# Altium PCB KC_BaseBoard4CompareTest-V0.3.PcbDoc
Units mil, origin at the board's own origin, x right, y up, seen from the top; angles counter-clockwise.
Board outline 7200 x 4200 mil, 2 copper layers (Top Layer, Bottom Layer); 26 components, 14 nets, 62 pads, 5 vias.
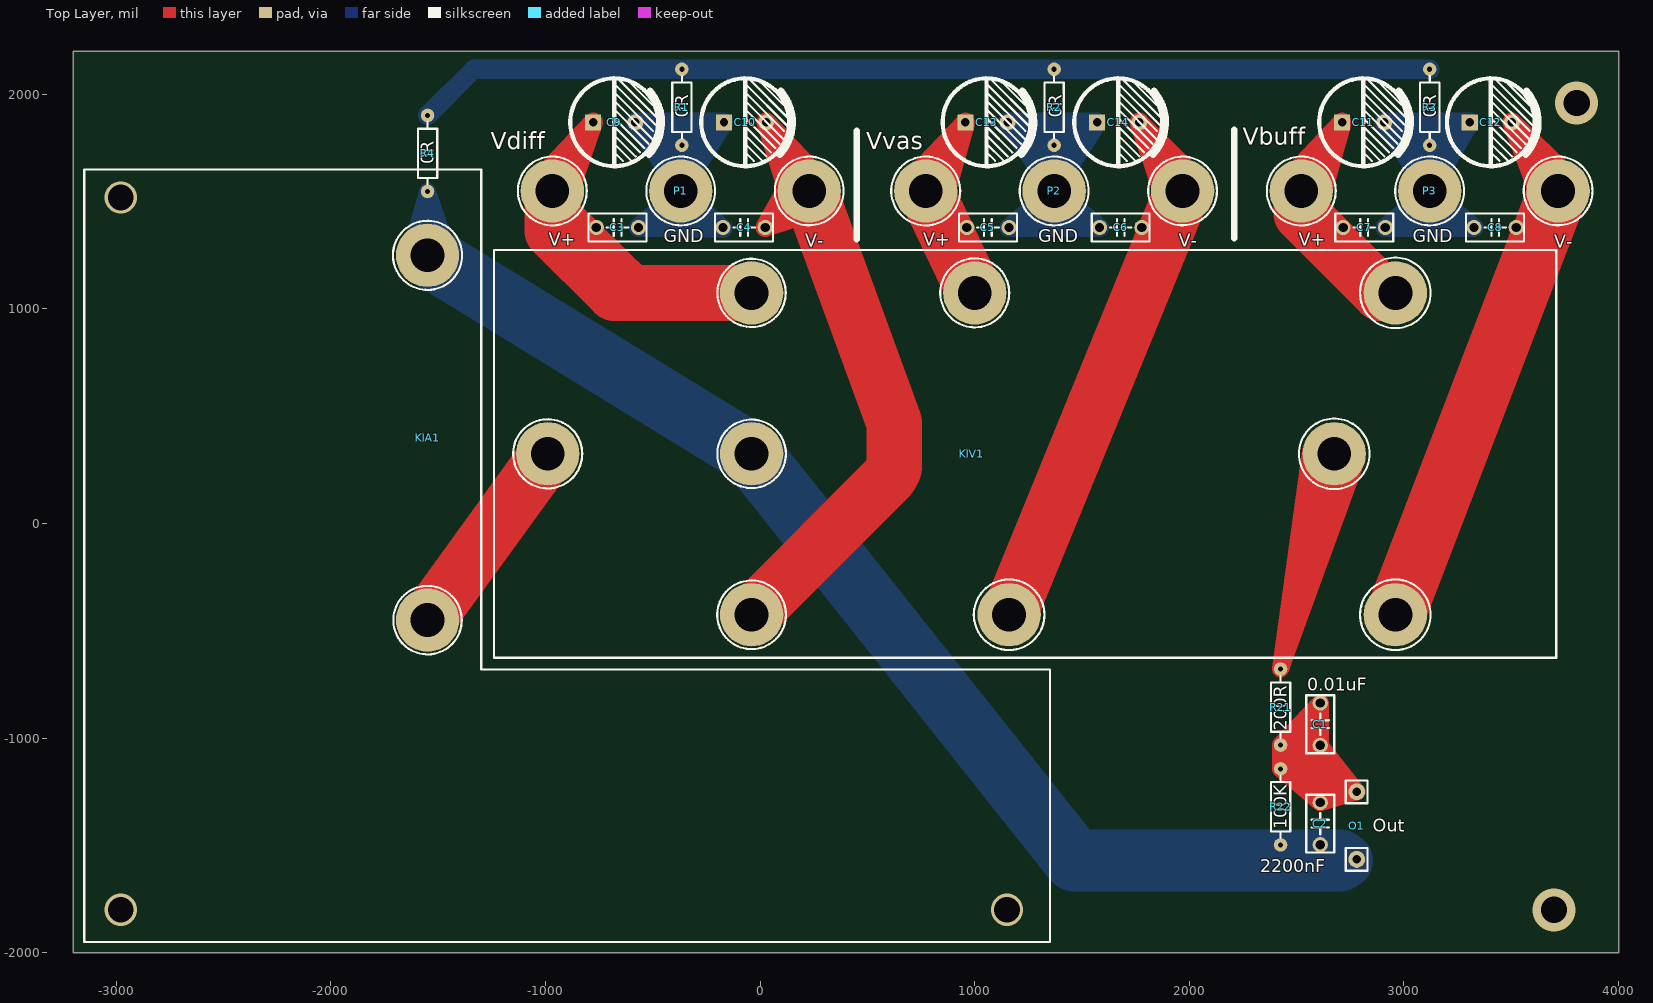
[diagram p0: Top Layer view]
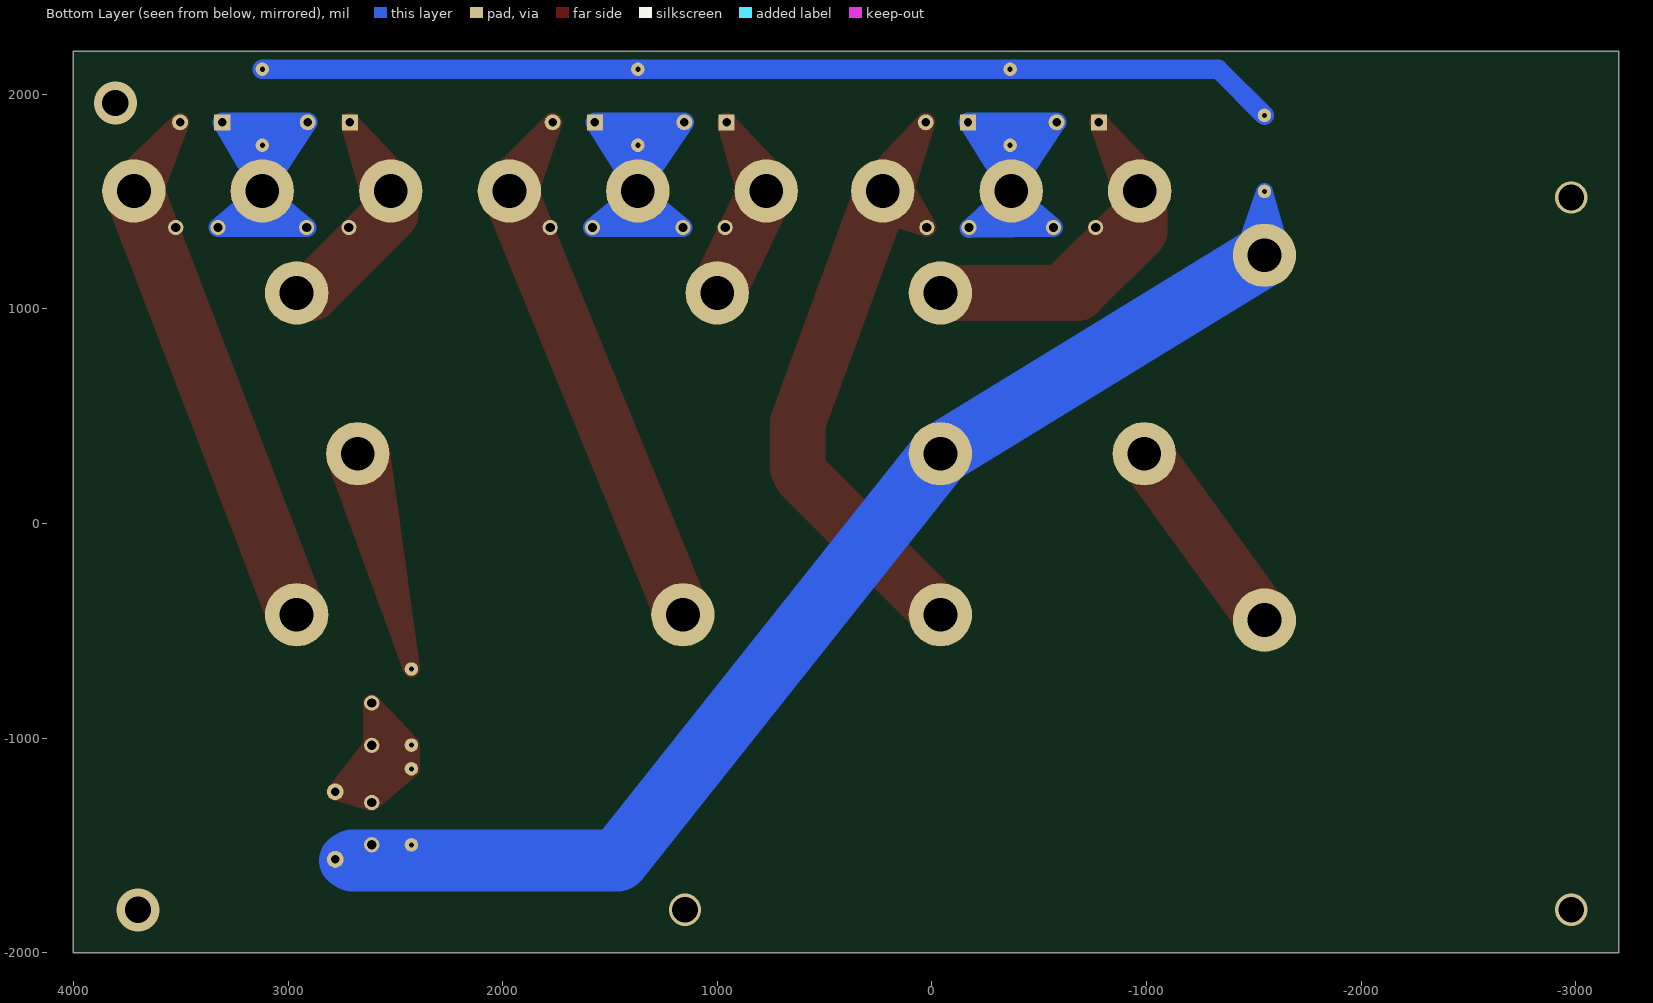
[diagram p1: Bottom Layer view, seen from below]

## Layer stack, top to bottom
Top Solder: solder mask 0.4, Solder Resist, Dk 3.5
Top Layer: signal copper 1.4
Dielectric 1: dielectric 12.6, FR-4, Dk 4.8
Bottom Layer: signal copper 1.4
Bottom Solder: solder mask 0.4, Solder Resist, Dk 3.5

## Board outline
-3200,-2000 4000,-2000 4000,2200 -3200,2200

## Design rules (kind name [scope] priority, off if disabled: settings)
Clearance [All] p1: gap=10 ignorepadtopadclearanceinfootprint=FALSE except(0: Arc-Hole Track-Hole SMDPad-Hole THPad-Hole Via-Hole Fill-Hole Poly-Hole Region-Hole Text-Hole)
PolygonConnect [All] p1: connectstyle=Relief reliefconductorwidth=10 reliefentries=4 polygonreliefangle="90 Angle" airgapwidth=10
RoomDefinition KC_BaseBoard4CompareTest-V0.3 [InComponentClass('KC_BaseBoard4CompareTest-V0.3')] p1: confinementstyle=ConfineIn formatcopy=TRUE lockcomponents=FALSE outline 7050,-1896.57 15425,-1896.57 15425,3173.43 7050,3173.43
RoutingVias [All] p1: holewidth=28 width=50 viastyle="Through Hole" minholewidth=28 minwidth=50 maxholewidth=28 maxwidth=50
SolderMaskExpansion [All] p1: expansion=4
Width [All] p1: maxlimit=300 minlimit=10 preferedwidth=90
30 further rules are at their usual default settings.

## Components (designator, comment, footprint, x,y, rotation, side; value= is the part's Value field where it differs from the comment)
C1 "0.01uF" "CBB 6.3*6.3*5" 2610,-935 r270 top
C2 "2200nF" "CBB 6.3*6.3*5" 2610,-1398.43 r270 top
C3 "0.01uF" "CBB 6.3*6.3*5" -665,1380 r180 top
C4 "0.01uF" "CBB 6.3*6.3*5" -75,1380 r180 top
C5 "0.01uF" "CBB 6.3*6.3*5" 1061.57,1380 r0 top
C6 "0.01uF" "CBB 6.3*6.3*5" 1680,1380 r180 top
C7 "0.01uF" "CBB 6.3*6.3*5" 2815,1380 r0 top
C8 "0.01uF" "CBB 6.3*6.3*5" 3425,1380 r180 top
C9 "220uF" "CAP 5.0*10*12.5" -680,1870 r0 top
C10 "220uF" "CAP 5.0*10*12.5" -70,1870 r0 top
C11 "220uF" "CAP 5.0*10*12.5" 2810,1870 r0 top
C12 "220uF" "CAP 5.0*10*12.5" 3405,1870 r0 top
C13 "220uF" "CAP 5.0*10*12.5" 1055,1870 r0 top
C14 "220uF" "CAP 5.0*10*12.5" 1668.43,1870 r0 top
KIA1 "KCInput_Attenuator" KCIn_Attenuator -1550,250 r0 top
KIV1 "KCInputVas_SP" KCIn_VAS_SP_M4 -40,325 r0 top
O1 "Out" Signal_Terminal 2780,-1250 r270 top
P1 "Vdiff" KC_MBPowerReg4Compare -370,1550 r90 top
P2 "Vvas" KC_MBPowerReg4Compare 1370,1550 r90 top
P3 "Vbuff" KC_MBPowerReg4Compare 3120,1550 r90 top
R1 "0R" "RS 1/4W" -365,1940 r270 top
R2 "0R" "RS 1/4W" 1370,1940 r270 top
R3 "0R" "RS 1/4W" 3120,1940 r270 top
R4 "0R" "RS 1/4W" -1550,1725 r270 top
R21 "200R" "RS 1/4W" 2425,-855 r90 top
R22 "100K" "RS 1/4W" 2425,-1320 r270 top

## Footprints (in the part's own frame and the unit in brackets; to place one, negate y for a bottom-side part, rotate by r counter-clockwise, add the part's x,y. Pads: shape width x height; smd on the part's side, far side on the other; paste and mask are expansions set on the pad)
"CAP 5.0*10*12.5" [mm] "脚距5mm直径10mm高度12.5mm"
  rect 1.9x1.9 hole 1: 1(-2.5,0)
  round 1.9 hole 1: 2(2.5,0)
  silkscreen extent -5.2,-5.2 5.64,5.2, body extent -5,-5.01 5.01,4.99, height 12.55
"CBB 6.3*6.3*5" [mm] "脚距5mm高6.3mm厚3mm"
  round 1.8 hole 1.1: 1(-2.5,0) 2(2.5,0)
  silkscreen extent -3.43,-1.65 3.43,1.65, body extent -3.15,-1.5 3.15,1.5, height 6.8
KC_MBPowerReg4Compare [mm]
  round 7.5 hole 4: 1(0,15.2) 2(0,-15.2) 3(0,0)
  silkscreen extent -4.08,-19.26 4.08,19.27
KCIn_Attenuator [mm]
  round 7.5 hole 4: 1(0,-17.78) 2(0,25.4)
  silkscreen extent -40.64,-55.88 73.66,35.56
KCIn_VAS_SP_M4 [mm]
  round 7.5 hole 4: 1(-24.13,0) 2(0,0) 3(0,19.05) 4(0,-19.05) 5(26.416,19.05) 6(30.48,-19.05) 7(76.2,19.05) 8(76.2,-19.05) 9(68.961,0)
  silkscreen extent -30.48,-24.13 95.25,24.13
"RS 1/4W" [mm] "直插色环电阻，脚距9mm，直径2.3mm"
  round 1.6 hole 0.6: 1(-4.5,0) 2(4.5,0)
  silkscreen extent -3.68,-1.14 3.68,1.14, body extent -4.72,-1.16 4.73,1.16, height 2.32
Signal_Terminal [mm] "Signal Path Pin"
  round 2 hole 1: 1(0,0) 2(8,0)
  silkscreen extent -1.35,-1.3 9.35,1.3

## Part data
C1 C2 C3 C4 C5 C6 C7 C8: library part C-CBB, "CBB电容", BOM名称=CBB电容, 学习资源=www.ooocke.com, 版权归属=源创客
C9 C10 C11 C12 C13 C14: library part C-CAP, "直插电解电容", BOM名称=直插电解电容, 学习资源=www.ooocke.com, 版权归属=源创客
KIA1: "King Cello Input Attenuator"
KIV1: "King Cello Input Stage and VAS for Seperated Power"
O1: library part Signal_Out, "Signal Out"
P1 P2 P3: library part MainBoardPowerRegulator4CompareTest, "King Cello Compare Test Power"
R1 R2 R3 R4 R21 R22: library part R-CRR, "直插色环电阻", BOM名称=色环电阻, 学习资源=www.ooocke.com, 版权归属=源创客

## Via types
v1: diameter 150, hole 120, Top Layer to Bottom Layer, 3 vias
v2: diameter 200, hole 122, Top Layer to Bottom Layer, 2 vias

## Nets (pads, with @x,y where several pads share a name; then routed paths per layer and width w, separated by ;. In a path a pad name is that pad's centre, name@x,y a point inside that pad or via, vN(x,y) a via of type N, cw(c..) or ccw(c..) an arc to the next point about the centre after c; other vN are vias at no path point)
NetC1_1: C1.1 C1.2 C2.1 O1.1 R21.1 R22.1 | length 2377.6
  Top Layer w80: 2525,-1170 2480,-1095 2535,-1075 C2.1 ; 2545,-970 C1.2 ; 2695,-1225 2655,-1185 C2.1 ; R21.1 R22.1 C2.1 ; R21.1 C1.1 C1.2 ; R21.1 C1.2 ; C2.1 C1.2 ; C2.1 O1.1 C1.2
NetC2_2: C2.2 KIA1.2 KIV1.2 O1.2 R4.2 R22.2 | length 6315.5
  Bottom Layer w80: KIA1.2@-1630,1270 -1629.19,1272.8 R4.2 ; KIA1.2 R4.2 ; KIA1.2@-1460,1285 R4.2
  Bottom Layer w260: 2700.04,-1570 2725,-1570
  Bottom Layer w290: KIA1.2 KIV1.2 1465,-1570 2700.04,-1570
NetC3_1: C3.1 C4.2 C9.2 C10.1 P1.3 R1.2 | length 3852
  Bottom Layer w80: P1.3@-416.31,1455.43 P1.3@-395,1445 ; P1.3@-410.34,1637.54 P1.3@-405,1640
  Bottom Layer w90: P1.3@-470,1565 -457.11,1591.83 P1.3@-432.1,1643.92 ; -440,1740 R1.2@-375,1762.83 ; P1.3@-270,1555 -288.32,1591.26 P1.3@-313.1,1640.32 ; C9.2 P1.3@-432.1,1643.92 ; C9.2 -441.7,1797.44 ; C9.2 -310,1870 ; -510,1428.93 C3.1 -372.19,1377.53 -173.49,1375 -173.43,1375 -175.91,1377.21 -249.04,1442.31 ; -510,1428.93 P1.3 ; -510,1428.93 -364.17,1436.41 -249.04,1442.31 ; -441.7,1797.44 R1.2@-375,1762.83 ; -441.7,1797.44 -397.49,1821.8 -310,1870 ; P1.3@-432.1,1643.92 P1.3 ; P1.3@-432.1,1643.92 R1.2@-375,1762.83 ; R1.2@-375,1762.83 -372.97,1758.81 P1.3@-313.1,1640.32 ; R1.2@-375,1762.83 -367.12,1766.92 C10.1 ; R1.2@-375,1762.83 -374.99,1762.6 P1.3 ; R1.2@-375,1762.83 -366.28,1759.49 -263.01,1719.85 ; P1.3 P1.3@-313.1,1640.32 ; P1.3 -249.04,1442.31 ; P1.3@-313.1,1640.32 -263.01,1719.85 ; -310,1870 C10.1 ; -263.01,1719.85 C10.1
NetC3_2: C3.2 C9.1 KIV1.3 P1.1 | length 2887.3
  Top Layer w90: P1.1@-1015,1620 C9.1 ; P1.1@-890,1545 C9.1 ; -545,1135 -778.88,1364.23 P1.1 C9.1
  Top Layer w260: P1.1 -968.43,1363.43 -680,1075 KIV1.3
NetC4_1: C4.1 C10.2 KIV1.4 P1.2 | length 4144.6
  Top Layer w90: P1.2@125,1565 P1.2@124.2,1563.55 ; P1.2@130,1545 P1.2@124.2,1563.55 ; P1.2@260,1625 C10.2 ; P1.2@305,1470 262.76,1456.5 258.72,1455.21 C4.1 ; C4.1 P1.2 C10.2 ; C4.1 P1.2@124.2,1563.55 ; C10.2 P1.2@124.2,1563.55
  Top Layer w260: KIV1.4 595.71,210.71 ccw(c525,281.42) 625,281.42 625,470 262.76,1456.5 P1.2
NetC5_1: C5.1 C13.1 KIV1.5 P2.1 | length 1583.4
  Top Layer w90: P2.1@720,1620 C13.1 ; P2.1 C13.1 ; P2.1@865,1540 C13.1
  Top Layer w260: P2.1 869.04,1347.34 872,1341.17 873.95,1337.11 874.6,1335.77 KIV1.5
NetC5_2: C5.2 C6.2 C13.2 C14.1 P2.3 R2.2 | length 3502.7
  Bottom Layer w80: P2.3@1322.89,1456.09 P2.3@1345,1445 ; P2.3@1325.12,1640.08 P2.3@1335,1645
  Bottom Layer w90: 1325,1735 1231.69,1808.42 ; 1410,1735 C14.1 ; 1495,1825 1366.59,1816.91 1365.83,1816.87 ; C13.2 1365,1870 ; C13.2 1196.6,1806.21 ; C13.2 1231.69,1808.42 ; 1196.6,1806.21 1231.69,1808.42 ; 1196.6,1806.21 P2.3 ; 1227.94,1435 C5.2 C6.2 1504.55,1441.89 ; 1227.94,1435 P2.3 ; 1227.94,1435 1372.77,1438.61 1504.55,1441.89 ; 1231.69,1808.42 1361.61,1816.6 1365.83,1816.87 ; 1365,1870 C14.1 ; 1365,1870 1365.83,1816.87 ; 1365.83,1816.87 1366.67,1762.86 1366.68,1762.78 P2.3 ; P2.3 C14.1 ; P2.3 1504.55,1441.89
NetC6_1: C6.1 C14.2 KIV1.6 P2.2 | length 3251.6
  Top Layer w90: P2.2@1885,1520 1884.44,1521.65 C14.2 ; P2.2 C14.2 ; P2.2@2030,1610 2028.84,1611.15 C14.2
  Top Layer w260: KIV1.6 1881.56,1337.78 P2.2
NetC7_1: C7.1 C11.1 KIV1.7 P3.1 | length 1873.5
  Top Layer w90: P3.1@2485,1630 C11.1 ; P3.1@2521.57,1443.43 2561.19,1532.36 C11.1 ; P3.1@2610,1505 2615.27,1523.93 C11.1
  Top Layer w260: P3.1 2521.57,1443.43 2890,1075 KIV1.7
NetC7_2: C7.2 C8.2 C11.2 C12.1 P3.3 R3.2 | length 3145.3
  Bottom Layer w80: P3.3@3078.01,1457.73 P3.3@3095,1450 ; P3.3@3078.51,1639.68 P3.3@3090,1645
  Bottom Layer w90: 3130,1730 3139.84,1737.81 C12.1 ; P3.3@3140,1685 3089.84,1725.08 2967.34,1822.93 ; 3210,1820 3120.7,1821.08 2967.34,1822.93 ; C11.2 C12.1 ; C11.2 P3.3 ; C11.2 2967.34,1822.93 ; 3001.5,1452.48 C7.2 C8.2 3250.42,1442.67 ; 3001.5,1452.48 P3.3 ; 3001.5,1452.48 3115.98,1447.97 3250.42,1442.67 ; P3.3 C12.1 ; P3.3 3250.42,1442.67
NetC8_1: C8.1 C12.2 KIV1.8 P3.2 | length 3253.4
  Top Layer w90: P3.2@3635,1525 C12.2 ; P3.2 C12.2 ; P3.2@3780,1605 3775.37,1609.43 C12.2
  Top Layer w260: 3636.47,1336.59 3638.15,1340.95 3640.07,1345.97 3642.78,1353.01
  Top Layer w280: KIV1.8 3636.47,1336.59 ; 3642.78,1353.01 P3.2
NetKIA1_1: KIA1.1 KIV1.1 | length 956.2
  Top Layer w260: KIA1.1 KIV1.1
NetKIV1_9: KIV1.9 R21.2 | length 5074.7
  Top Layer w80: KIV1.9@2565,335 R21.2 ; KIV1.9@2610,300 R21.2 ; KIV1.9 R21.2 ; KIV1.9@2720,265 R21.2 ; KIV1.9@2780,295 2777.32,287.66 R21.2
NetR1_1: R1.1 R2.1 R3.1 R4.1 | length 4759.1
  Bottom Layer w90: R4.1 -1335,2117.17 R1.1 R2.1 R3.1
copper on no net:
  other v1: -2980,-1800 1150,-1800 -2980,1520
  other v2: 3700,-1800 3805,1960

## Silkscreen, mask and mechanical layers (free items; w line width, h text height)
Top Overlay:
  lines w30: 450,1325 450,1830 ; 2210,1330 2210,1835
  text "GND" at -450,1310 h60
  text "GND" at 1295,1310 h60
  text "GND" at 3040,1310 h60
  text "V+" at -985,1295 h60
  text "V+" at 760,1295 h60
  text "V+" at 2510,1295 h60
  text "V-" at 210,1290 h60
  text "V-" at 1950,1290 h60
  text "V-" at 3700,1285 h60
Drill Drawing:
  the board outline again, w10